# Altium PCB MyPcb_v1.PcbDoc
Units mm, origin at the board's own origin, x right, y up, seen from the top; angles counter-clockwise.
Board outline 127 x 101.6 mm, 2 copper layers (Top Layer, Bottom Layer); 39 components, 45 nets, 163 pads, 0 vias.
Unrouted connection lines stored in the file: 104.
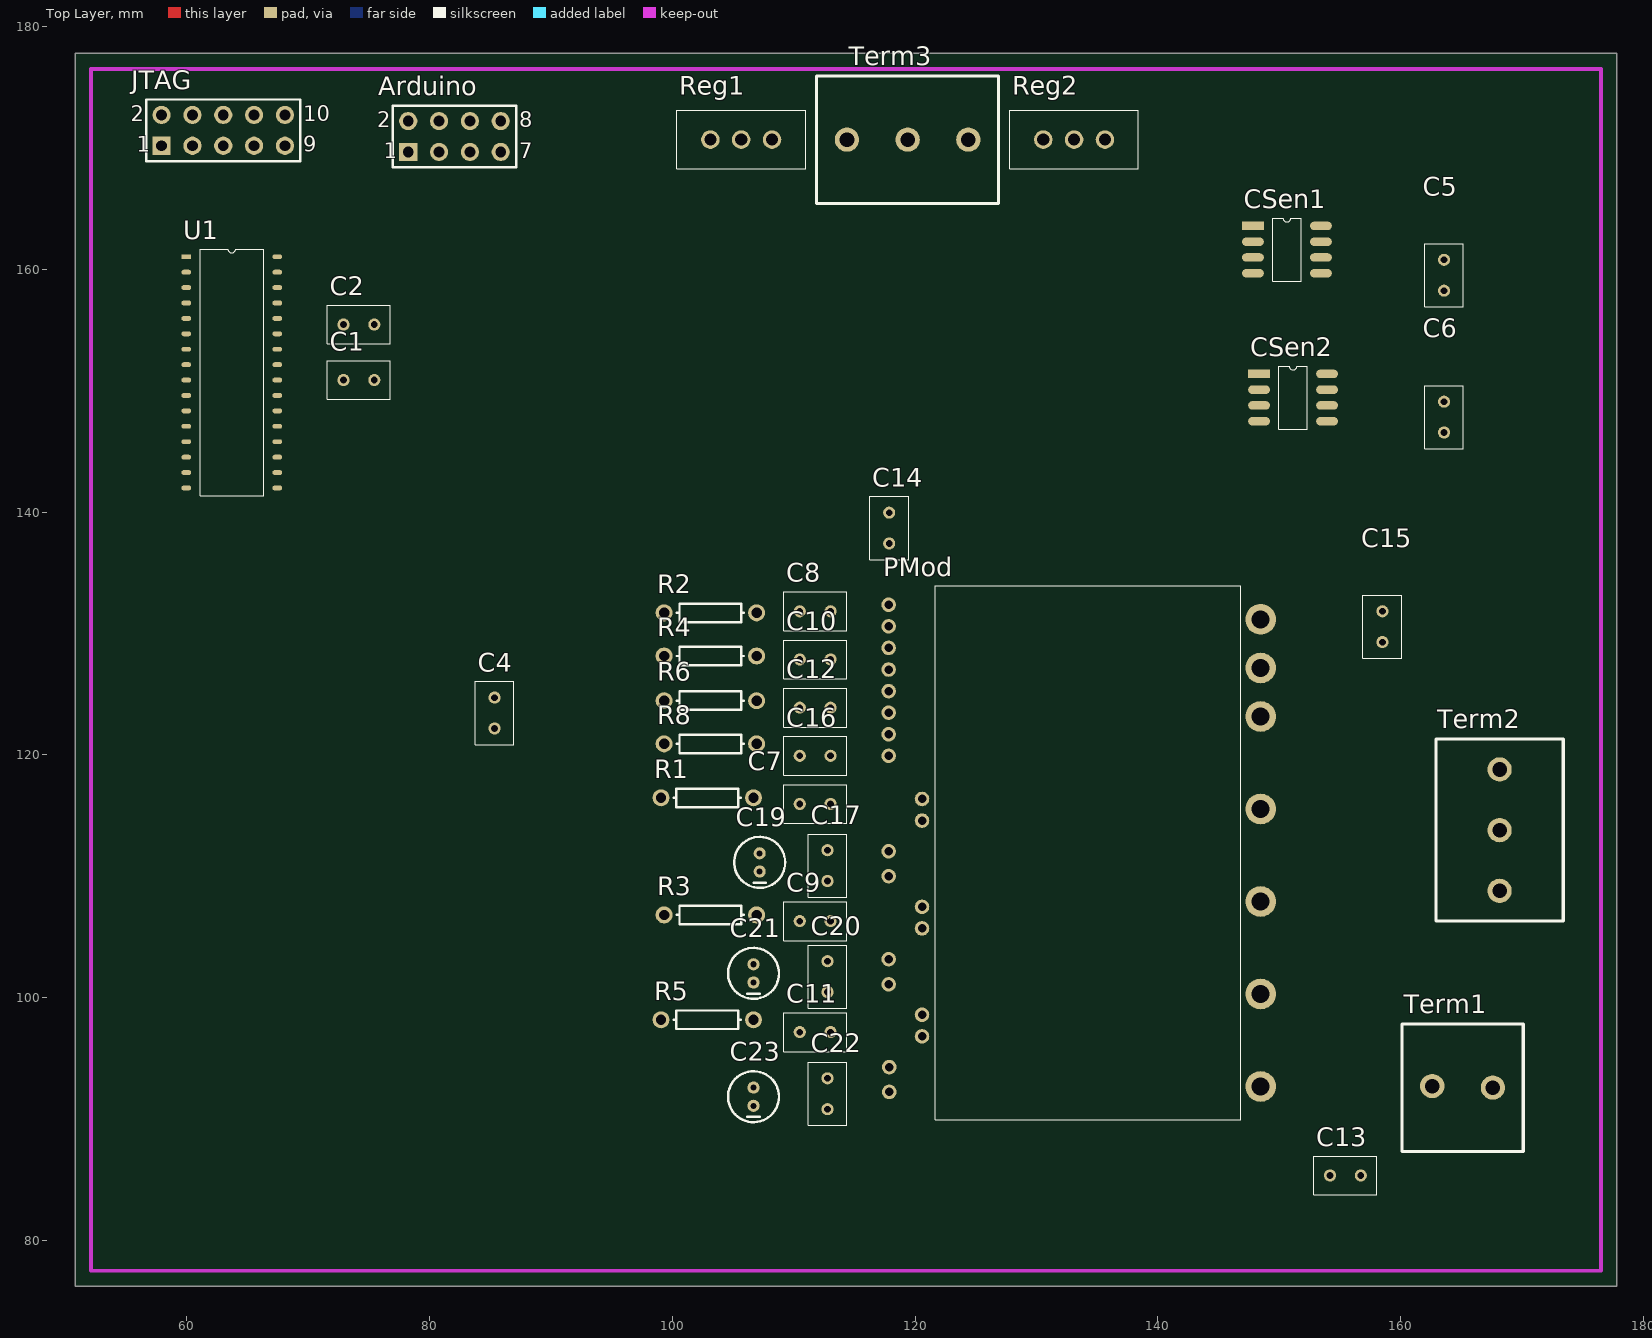
[diagram p0: Top Layer view]
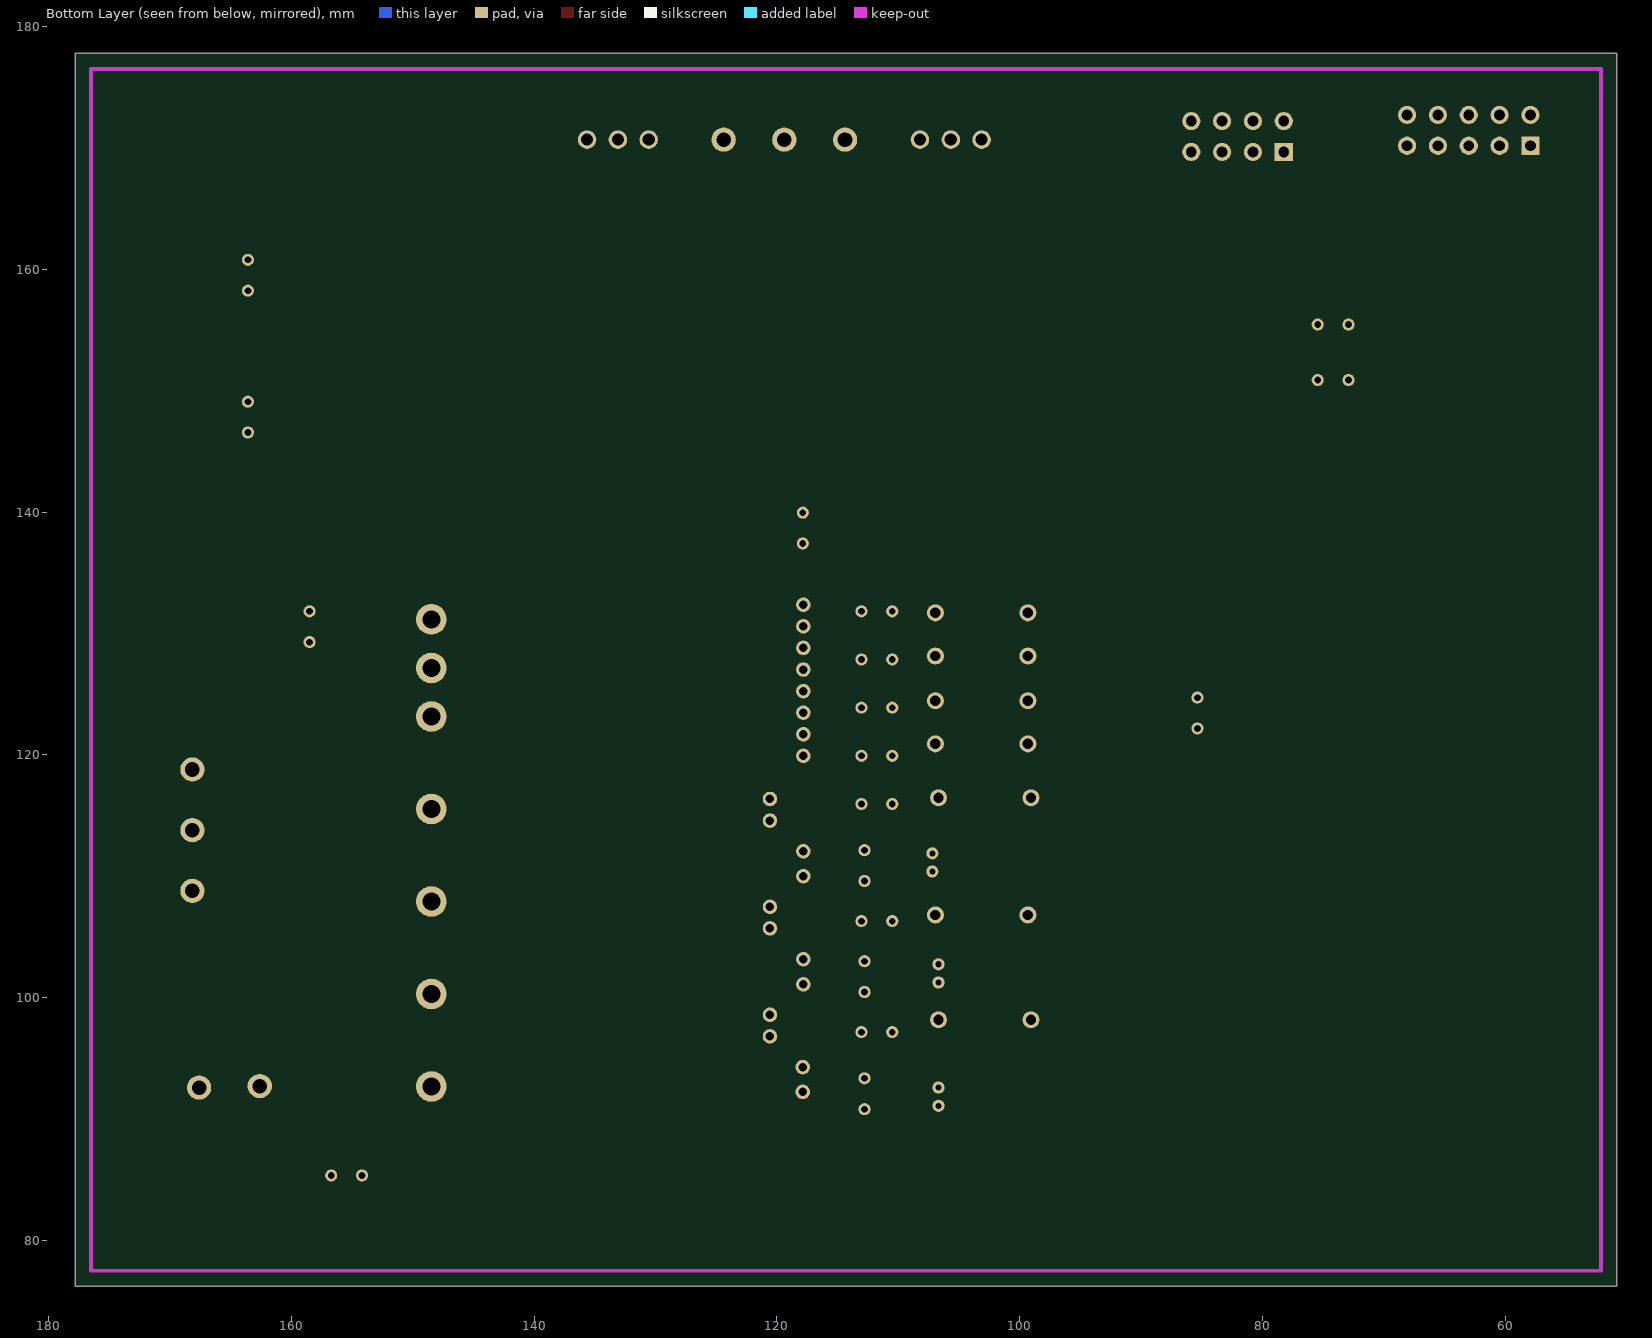
[diagram p1: Bottom Layer view, seen from below]

## Layer stack, top to bottom
Top Layer: signal copper 0.0356
Dielectric: dielectric 0.32, FR-4, Dk 4.8
Bottom Layer: signal copper 0.0356

## Board outline
50.8,76.2 177.8,76.2 177.8,177.8 50.8,177.8

## Design rules (kind name [scope] priority, off if disabled: settings)
Clearance [All] p1: gap=0.2
PolygonConnect [All] p1: connectstyle=Relief reliefconductorwidth=0.254 reliefentries=4 polygonreliefangle="90 Angle"
RoutingVias [All] p1: holewidth=0.6 width=1 viastyle="Through Hole" minholewidth=0.711 minwidth=1.27 maxholewidth=0.711 maxwidth=1.27
SilkscreenOverComponentPads [All] p1: minsilkscreentomaskgap=0.254
SolderMaskExpansion [All] p1: expansion=0.102
Width [All] p1: maxlimit=0.2 minlimit=0.2 preferedwidth=0.2
27 further rules are at their usual default settings.

## Components (designator, comment, footprint, x,y, rotation, side; value= is the part's Value field where it differs from the comment)
Arduino "Header 4X2" HDR2X4 78.232,169.672 r0 top
C1 "Cap" NPolar_Cap 74.168,150.876 r180 top
C2 "Cap" NPolar_Cap 74.168,155.448 r180 top
C4 "Cap" NPolar_Cap 85.344,123.444 r270 top
C5 "Cap" NPolar_Cap 163.576,159.512 r90 top
C6 "Cap" NPolar_Cap 163.576,147.828 r90 top
C7 "Cap" NPolar_Cap 111.76,115.951 r0 top
C8 "Cap" NPolar_Cap 111.76,131.826 r0 top
C9 "Cap" NPolar_Cap 111.76,106.299 r0 top
C10 "Cap" NPolar_Cap 111.76,127.857 r0 top
C11 "Cap" NPolar_Cap 111.76,97.155 r0 top
C12 "Cap" NPolar_Cap 111.76,123.888 r0 top
C13 "Cap" NPolar_Cap 155.448,85.344 r180 top
C14 "Cap" NPolar_Cap 117.856,138.684 r270 top
C15 "Cap" NPolar_Cap 158.496,130.556 r90 top
C16 "Cap" NPolar_Cap 111.76,119.92 r0 top
C17 "Cap" NPolar_Cap 112.776,110.871 r90 top
C19 "Cap2" Polar_Cap 107.188,111.887 r270 top
C20 "Cap" NPolar_Cap 112.776,101.727 r90 top
C21 "Cap2" Polar_Cap 106.68,102.743 r270 top
C22 "Cap" NPolar_Cap 112.776,92.075 r90 top
C23 "Cap2" Polar_Cap 106.68,92.583 r270 top
CSen1 "ACS712" ACS712 147.828,163.576 r0 top
CSen2 "ACS712" ACS712 148.336,151.384 r0 top
JTAG "Header 5X2" HDR2X5 57.912,170.18 r0 top
PMod "FSBB15CH60C" FSBB20CH60F 148.463,89.916 r90 top
R1 "Res1" AXIAL-0.3 102.87,116.459 r0 top
R2 "Res1" AXIAL-0.3 103.124,131.699 r0 top
R3 "Res1" AXIAL-0.3 103.124,106.807 r0 top
R4 "Res1" AXIAL-0.3 103.124,128.143 r0 top
R5 "Res1" AXIAL-0.3 102.87,98.171 r0 top
R6 "Res1" AXIAL-0.3 103.124,124.46 r0 top
R8 "Res1" AXIAL-0.3 103.124,120.904 r0 top
Reg1 "U7805" U7800 108.204,170.688 r180 top
Reg2 "U7815" U7800 130.556,170.688 r0 top
Term1 "Terminal Block 2P" "Terminal Block 2 Pin" 165.1,92.583 r0 top
Term2 "Terminal Block 3P" "Terminal Block 3 Pin" 168.148,113.792 r270 top
Term3 "Terminal Block 3P" "Terminal Block 3 Pin" 119.38,170.688 r0 top
U1 "AT90PWM3" AT90PWM3B 59.944,161.036 r0 top

## Footprints (in the part's own frame and the unit in brackets; to place one, negate y for a bottom-side part, rotate by r counter-clockwise, add the part's x,y. Pads: shape width x height; smd on the part's side, far side on the other; paste and mask are expansions set on the pad)
ACS712 [mm]
  rect 1.8x0.7 smd: 1(0,0)
  oval 1.8x0.7 smd: 2(0,-1.3) 3(0,-2.6) 4(0,-3.9) 5(5.6,-3.9) 6(5.6,-2.6) 7(5.6,-1.3) 8(5.6,0)
  silkscreen extent 1.63,-4.55 3.97,0.65
AT90PWM3B [mm]
  rect 0.8x0.4 smd: 1(0,0)
  oval 0.8x0.4 smd: 2(0,-1.27) 3(0,-2.54) 4(0,-3.81) 5(0,-5.08) 6(0,-6.35) 7(0,-7.62) 8(0,-8.89) 9(0,-10.16) 10(0,-11.43) 11(0,-12.7) 12(0,-13.97) 13(0,-15.24) 14(0,-16.51) 15(0,-17.78) 16(0,-19.05) 17(7.5,-19.05) 18(7.5,-17.78) 19(7.5,-16.51) 20(7.5,-15.24) 21(7.5,-13.97) 22(7.5,-12.7) 23(7.5,-11.43) 24(7.5,-10.16) 25(7.5,-8.89) 26(7.5,-7.62) 27(7.5,-6.35) 28(7.5,-5.08) 29(7.5,-3.81) 30(7.5,-2.54) 31(7.5,-1.27) 32(7.5,0)
  silkscreen extent 1.13,-19.68 6.37,0.64
AXIAL-0.3 [mm] "Axial Device, Thru-Hole; 2 Leads; 0.3 in Pin Spacing"
  round 1.4 hole 0.85: 1(-3.81,0) 2(3.81,0)
  silkscreen extent -2.77,-0.76 2.77,0.76
FSBB20CH60F [mm]
  round 1.2 hole 0.7: 1(42.447,30.65) 2(40.669,30.65) 3(38.891,30.65) 4(37.113,30.65) 5(35.335,30.65) 6(33.557,30.65) 7(31.779,30.65) 8(30,30.65) 9(26.445,27.9) 10(24.667,27.9) 11(22.136,30.65) 12(20.086,30.65) 13(17.555,27.9) 14(15.777,27.9) 15(13.246,30.65) 16(11.169,30.65) 17(8.665,27.9) 18(6.887,27.9) 19(4.356,30.6) 20(2.306,30.6)
  round 2.524 hole 1.5: 21(41.24,0) 22(37.24,0) 23(33.24,0) 24(25.62,0) 25(18,0) 26(10.38,0) 27(2.76,0)
  silkscreen extent 0,1.65 44,26.8
HDR2X4 [mm] "Connector; Header; 4x2 Position"
  rect 1.5x1.5 hole 0.9: 1(0,0)
  round 1.5 hole 0.9: 2(0,2.54) 3(2.54,0) 4(2.54,2.54) 5(5.08,0) 6(5.08,2.54) 7(7.62,0) 8(7.62,2.54)
  silkscreen extent -1.27,-1.27 8.89,3.81
HDR2X5 [mm] "Connector; Header; 5x2 Position"
  rect 1.5x1.5 hole 0.9: 1(0,0)
  round 1.5 hole 0.9: 2(0,2.54) 3(2.54,0) 4(2.54,2.54) 5(5.08,0) 6(5.08,2.54) 7(7.62,0) 8(7.62,2.54) 9(10.16,0) 10(10.16,2.54)
  silkscreen extent -1.27,-1.27 11.43,3.81
NPolar_Cap [mm]
  round 1 hole 0.55: 1(-1.27,0) 2(1.27,0)
  silkscreen extent -2.6,-1.6 2.6,1.6
Polar_Cap [mm]
  round 1 hole 0.5: 1(0,0) 2(1.5,0)
  silkscreen extent -1.35,-2.1 2.85,2.1
"Terminal Block 2 Pin" [mm]
  round 2 hole 1.2: 1(-2.5,0.127) 2(2.5,0)
  silkscreen extent -5,-5.25 5,5.25
"Terminal Block 3 Pin" [mm]
  round 2 hole 1.2: 1(-5,0) 2(0,0) 3(5,0)
  silkscreen extent -7.5,-5.25 7.5,5.25
U7800 [mil]
  round 60 hole 39.37: 1(0,0) 2(100,0) 3(200,0)
  silkscreen extent -109,-94 309,94

## Part data
Arduino: "Header, 4-Pin, Dual row"
C1 C2 C4 C5 C6 C7 C8 C9 C10 C11 C12 C13 C14 C15 C16 C17 C19 C20 C21 C22 C23: "Capacitor"
CSen1 CSen2: library part ACS711
JTAG: "Header, 5-Pin, Dual row"
R1 R2 R3 R4 R5 R6 R8: "Resistor"
Reg1 Reg2: library part U7800

## Nets (pads, with @x,y where several pads share a name; then routed paths per layer and width w, separated by ;. In a path a pad name is that pad's centre, name@x,y a point inside that pad or via, vN(x,y) a via of type N, cw(c..) or ccw(c..) an arc to the next point about the centre after c; other vN are vias at no path point)
5V: C1.2 CSen1.8 CSen2.8 JTAG.2 R8.2 Reg1.2 U1.8 U1.23
15V: C14.2 PMod.1 PMod.10 PMod.14 PMod.18 Reg2.2
\R\E\S\E\T\: JTAG.5 U1.3
AGND: Arduino.8 C1.1 C2.1 C5.1 C6.1 CSen1.5 CSen2.5 U1.24
DGND: Arduino.7 C4.1 C7.1 C8.1 C9.1 C10.1 C11.1 C12.1 C14.1 C16.1 JTAG.4 JTAG.6 JTAG.8 JTAG.10 PMod.2 Reg1.3 Reg2.3 Term3.3 U1.9
FO: C4.2 PMod.6 R8.1 U1.7
ISEN_1: CSen1.7 U1.17
ISEN_2: CSen2.7 U1.18
MISO_A: JTAG.9 U1.5
MOSI_A: JTAG.1 U1.6
NetC2_2: C2.2 U1.25
NetC5_2: C5.2 CSen1.6
NetC6_2: C6.2 CSen2.6
NetC15_2: C15.2 PMod.21 PMod.22 PMod.23
NetC16_2: C16.2 PMod.7
PGND: C13.1 C15.1 Term1.2
REF_1: U1.21
REF_2: U1.22
REG1_IN: Reg1.1 Term3.1
REG2_IN: Reg2.1 Term3.2
SCK_A: JTAG.7 U1.16
UH: Arduino.1 R1.1 U1.1
UH': C7.2 PMod.9 R1.2
UL: Arduino.2 R2.1 U1.32
UL': C8.2 PMod.3 R2.2
UOUT: CSen1.3 CSen1.4 Term2.1
UOUT': CSen1.1 CSen1.2 PMod.24
V_DC: C13.2 PMod.27 Term1.1
VB(U): C17.2 C19.1 PMod.11
VB(V): C20.2 C21.1 PMod.15
VB(W): C22.2 C23.1 PMod.19
VH: Arduino.5 R3.1 U1.2
VH': C9.2 PMod.13 R3.2
VL: Arduino.6 R4.1 U1.31
VL': C10.2 PMod.4 R4.2
VOUT: CSen2.3 CSen2.4 Term2.2
VOUT': CSen2.1 CSen2.2 PMod.25
VS(U): C17.1 C19.2 PMod.12
VS(V): C20.1 C21.2 PMod.16
VS(W): C22.1 C23.2 PMod.20
WH: Arduino.3 R5.1 U1.12
WH': C11.2 PMod.17 R5.2
WL: Arduino.4 R6.1 U1.13
WL': C12.2 PMod.5 R6.2
WOUT: PMod.26 Term2.3
pads on no net: JTAG.3 PMod.8 U1.4 U1.10 U1.11 U1.14 U1.15 U1.19 U1.20 U1.26 U1.27 U1.28 U1.29 U1.30

## Keep-outs
Keep-Out Layer:
  lines w0.3: 52.1,77.5 52.1,176.5 176.5,176.5 176.5,77.5 52.1,77.5

## Silkscreen, mask and mechanical layers (free items; w line width, h text height)
Drill Drawing:
  text ".LEGEND" at 130.683,36.449 h1.52
  text "Drill Drawing." at 130.683,33.909 h1.52

## Dimensions
52.1,77.5 to 52.1,176.5 on Mechanical 1
52.1,77.5 to 176.5,77.5 on Mechanical 1

## Text inside footprints (layer, text, board x,y; h text height)
Arduino: Top Overlay "2" at 75.692,171.704 h1.27; Top Overlay "1" at 76.2,169.164 h1.27; Top Overlay "7" at 87.376,169.164 h1.27; Top Overlay "8" at 87.376,171.704 h1.27
JTAG: Top Overlay "10" at 69.596,172.212 h1.27; Top Overlay "9" at 69.596,169.672 h1.27; Top Overlay "1" at 55.88,169.672 h1.27; Top Overlay "2" at 55.372,172.212 h1.27